# Altium PCB Arduino DDS shield Rev 6.PcbDoc
Units mil, origin at the board's own origin, x right, y up, seen from the top; angles counter-clockwise.
Board outline 6000 x 4000 mil, 2 copper layers (Top Layer, Bottom Layer); 19 components, 15 nets, 96 pads, 2 vias.
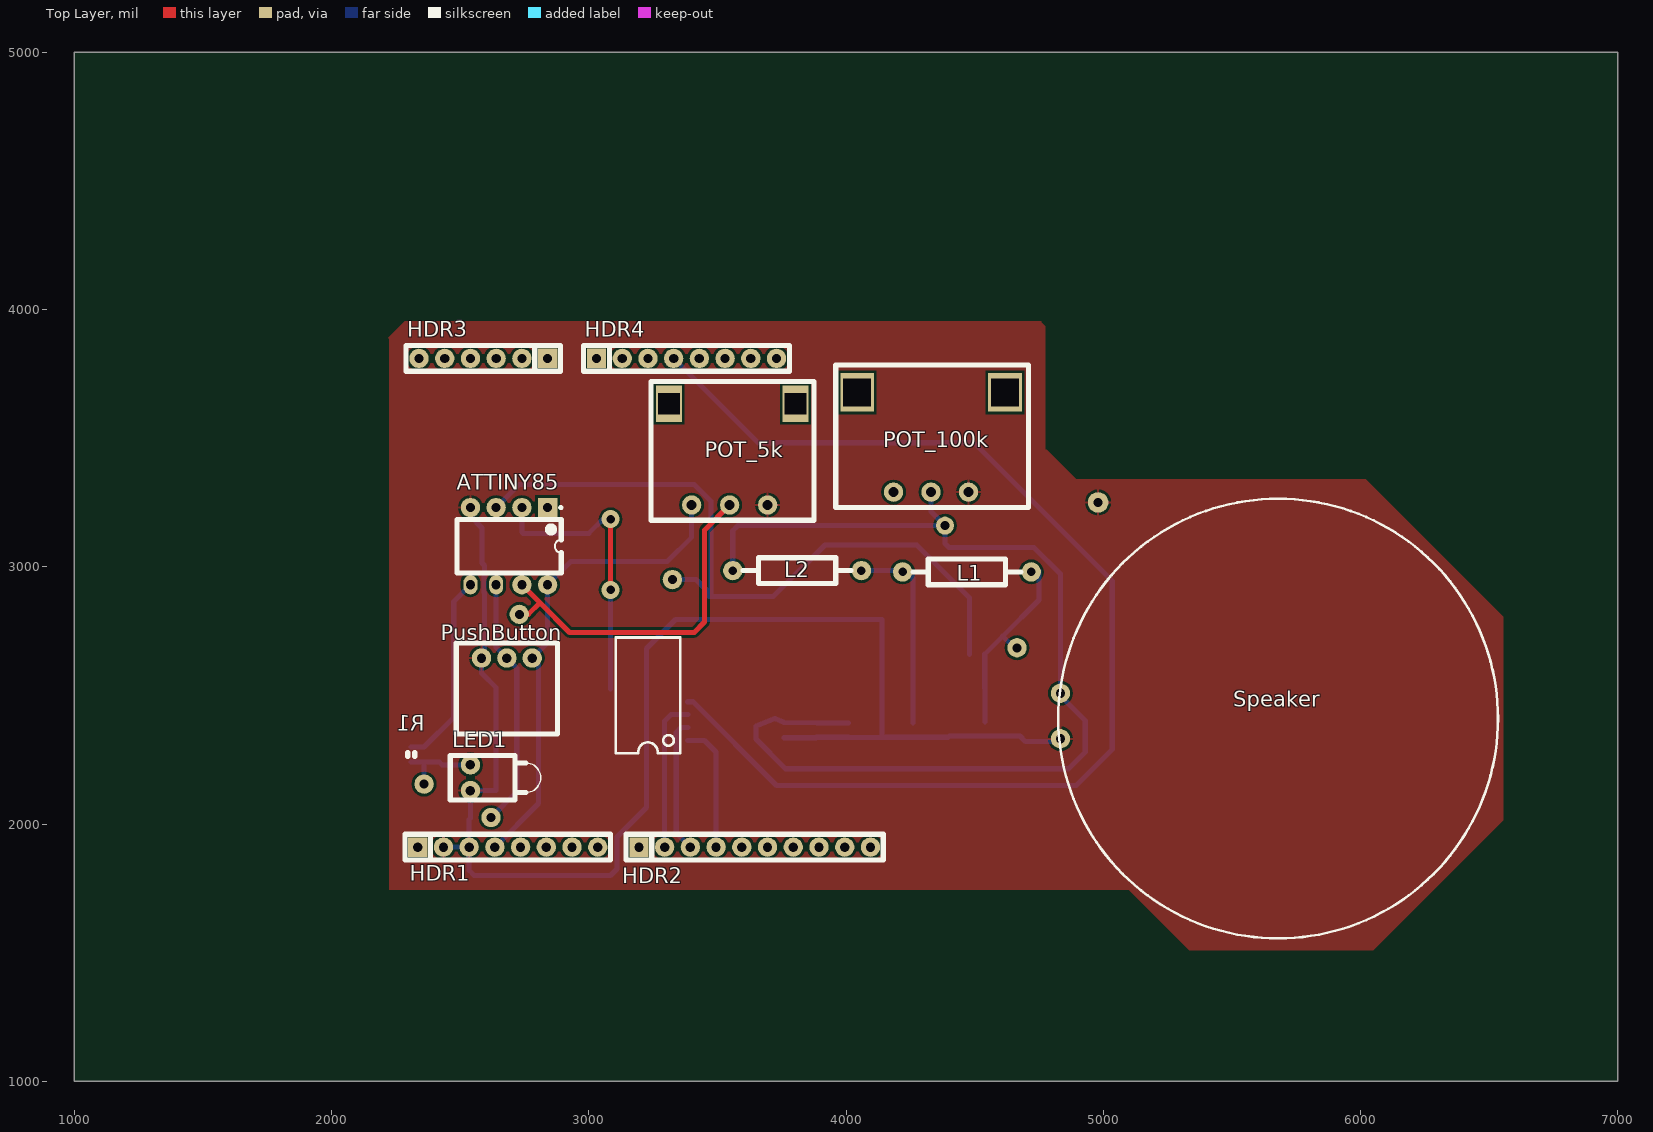
[diagram p0: Top Layer view]
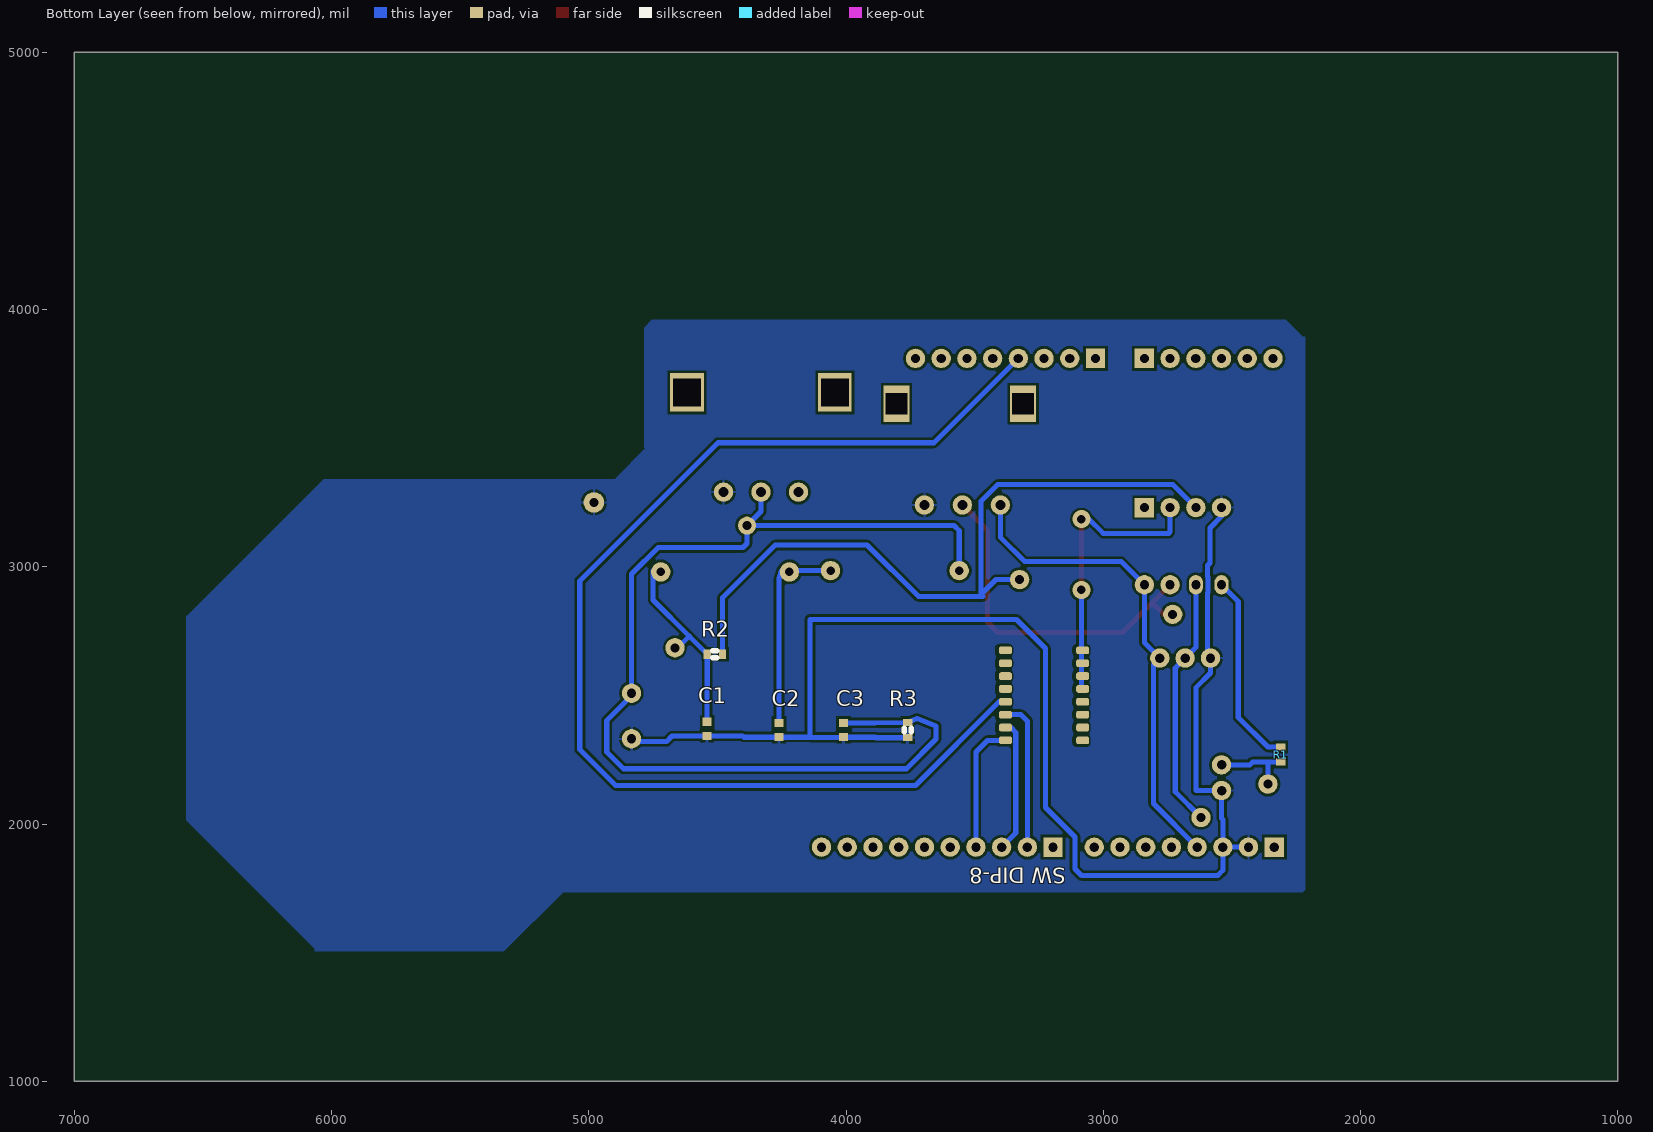
[diagram p1: Bottom Layer view, seen from below]

## Layer stack, top to bottom
Top Solder: solder mask 0.4, Solder Resist, Dk 3.5
Top Layer: signal copper 1.4
Dielectric 1: dielectric 12.6, FR-4, Dk 4.8
Bottom Layer: signal copper 1.4
Bottom Solder: solder mask 0.4, Solder Resist, Dk 3.5

## Board outline
1000,1000 7000,1000 7000,5000 1000,5000

## Design rules (kind name [scope] priority, off if disabled: settings)
Clearance Clearance_1 [All] p1: gap=10
Clearance [All] p2: gap=20
PolygonConnect [All] p1: connectstyle=Relief reliefconductorwidth=10 reliefentries=4 polygonreliefangle="90 Angle" airgapwidth=10
RoutingVias [All] p1: holewidth=28 width=50 viastyle="Through Hole" minholewidth=28 minwidth=50 maxholewidth=28 maxwidth=50
SolderMaskExpansion [All] p1: expansion=4
Width [All] p1: maxlimit=20 minlimit=20 preferedwidth=20 minimp=50.000000 maximp=50.000000 favimp=50.000000
30 further rules are at their usual default settings.

## Components (designator, comment, footprint, x,y, rotation, side; value= is the part's Value field where it differs from the comment)
ATTINY85 "ATtiny85-20PU" 8P3 2690,3080 r270 top
C1 "Cap Semi" 1608[0603] 4540,2370 r90 bottom
C2 "Cap Semi" 1608[0603] 4260,2365 r90 bottom
C3 "Cap Semi" 1608[0603] 4010,2365 r90 bottom
HDR1 "POWER_UNO" "Header 8x1 8.5mm" 2335,1910 r0 top
HDR2 "IOH" "Header 10x1 8.5mm" 3195,1910 r0 top
HDR3 "AD" "Header 6x1 8.5mm" 2840,3810 r180 top
HDR4 "IOL" "Header 8x1 8.5mm" 3030,3810 r0 top
L1 "Inductor" AXIAL-0.5 4470,2980 r180 top
L2 "Inductor" AXIAL-0.5 3810,2985 r180 top
LED1 "LED1" LED-1 2540,2180 r0 top
POT_5k "POT1" Pot5k 3400,3240 r0 top
POT_100k "Component_1" pot100k 4185,3290 r0 top
PushButton "BUTTON1" PushButtonFrame 2780,2645 r180 top
R1 "Res3" J1-0603#1 2310,2270 r90 top
R2 "Res3" J1-0603#2 4510,2660 r180 bottom
R3 "Res3" J1-0603#2 3760,2365 r90 bottom
Speaker "SPKR1" PCBComponent_1 5680,2410 r0 top
"SW DIP-8" "SW DIP-8" DIP8posSolder 3380,2325 r270 bottom

## Footprints (in the part's own frame and the unit in brackets; to place one, negate y for a bottom-side part, rotate by r counter-clockwise, add the part's x,y. Pads: shape width x height; smd on the part's side, far side on the other; paste and mask are expansions set on the pad)
8P3 [mm] "DIP, 8-Leads, Row Spacing 7.62mm, Pitch 2.54mm, Body 9.59x6.61mm"
  rect 1.908x1.908 hole 0.9 unplated paste+1.016: 1(-3.81,3.81)
  round 1.908 hole 0.9 unplated paste+1.016: 2(-3.81,1.27) 3(-3.81,-1.27) 4(-3.81,-3.81) 7(3.81,1.27) 8(3.81,3.81)
  oval 1.908x1.4 hole 0.9 unplated paste+1.016: 5(3.81,-3.81) 6(3.81,-1.27)
  silkscreen extent -3.93,-5.15 2.65,5.24, body extent -3.6,-5.15 3.6,5.15, height 5.34
1608[0603] [mm] "Chip Capacitor, Body 1.6x0.8mm, IPC High Density"
  rect 0.8x0.9 smd paste+0.508 mask+0.254: 1(-0.7,0) 2(0.7,0)
  body extent -0.87,-0.48 0.87,0.48, height 1.3
AXIAL-0.5 [mm] "Axial Device, Thru-Hole; 2 Leads; 0.5 in Pin Spacing"
  round 1.908 hole 0.85 unplated paste+1.016: 1(-6.35,0) 2(6.35,0)
  silkscreen extent -5.33,-1.27 5.33,1.27
DIP8posSolder [mm]
  rrect50% 0.76x1.27 smd paste+0.254: 1(0,0) 2(-1.27,0) 3(-2.54,0) 4(-3.81,0) 5(-5.08,0) 6(-6.35,0) 7(-7.62,0) 8(-8.89,0) 9(0,7.62) 10(-1.27,7.62) 11(-2.54,7.62) 12(-3.81,7.62) 13(-5.08,7.62) 14(-6.35,7.62) 15(-7.62,7.62) 16(-8.89,7.62)
"Header 6x1 8.5mm" [mil] "Stackable 6 pin header"
  rect 75.12x75.12 hole 36 unplated paste+40: 1(0,0)
  round 75.12 hole 36 unplated paste+40: 2(100,0) 3(200,0) 4(300,0) 5(400,0) 6(500,0)
  silkscreen extent -50,-50 550,50, body extent -50,-50 550,50, height 335
"Header 8x1 8.5mm" [mil] "Stackable 8 pin header"
  rect 75.12x75.12 hole 36 unplated paste+40: 1(0,0)
  round 75.12 hole 36 unplated paste+40: 2(100,0) 3(200,0) 4(300,0) 5(400,0) 6(500,0) 7(600,0) 8(700,0)
  silkscreen extent -50,-50 750,50, body extent -50,-50 750,50, height 335
"Header 10x1 8.5mm" [mil] "Stackable 10 pin header"
  rect 75.12x75.12 hole 36 unplated paste+40: 1(0,0)
  round 75.12 hole 36 unplated paste+40: 2(100,0) 3(200,0) 4(300,0) 5(400,0) 6(500,0) 7(600,0) 8(700,0) 9(800,0) 10(900,0)
  silkscreen extent -50,-50 950,50, body extent -50,-50 950,50, height 335
J1-0603#1 [mm] "Chip Resistor, Body 1.6x0.8mm, IPC High Density"
  rect 0.7x0.9 smd far side paste+0.508 mask+0.254: 1(-0.75,0) 2(0.75,0)
  silkscreen extent -0.2,-0.35 0.2,0.35, body extent -0.85,-0.48 0.85,0.48, height 0.9
J1-0603#2 [mm] "Chip Resistor, Body 1.6x0.8mm, IPC High Density"
  rect 0.7x0.9 smd paste+0.508 mask+0.254: 1(-0.75,0) 2(0.75,0)
  silkscreen extent -0.2,-0.35 0.2,0.35, body extent -0.85,-0.48 0.85,0.48, height 0.9
LED-1 [mil] "LED; 2 Leads"
  round 75.12 hole 36.5 unplated paste+40: 1(0,50) 2(0,-50)
  silkscreen extent -79,-87 274,87
PCBComponent_1 [mm]
  round 1.908 hole 0.914 unplated paste+1.016: 0(-21.5,2.5) 1(-21.5,-2)
  silkscreen extent -21.71,-21.71 21.71,21.71
Pot5k [mm]
  round 1.908 hole 1 unplated paste+1.016: 1(0,0) 2(3.75,0) 3(7.5,0)
  rect 2.557x3.559 hole 2.1 square unplated paste+1.016: ThroughHole1(-2.25,10)
  rect 2.543x3.556 hole 2.1 square unplated paste+1.016: ThroughHole2(10.25,10)
  silkscreen extent -4,-1.5 12.06,12.19
pot100k [mm]
  round 1.908 hole 1 unplated paste+1.016: 1(0,0) 2(3.7,0) 3(7.4,0)
  rect 3.31x3.81 hole 2.7 square unplated paste+1.016: ThroughHole1(-3.6,9.85)
  rect 3.322x3.81 hole 2.7 square unplated paste+1.016: ThroughHole2(11,9.85)
  silkscreen extent -5.71,-1.5 13.33,12.57
PushButtonFrame [mm]
  round 1.908 hole 0.927 unplated paste+1.016: 0(0,0) 1(2.5,0) 2(5,0)
  silkscreen extent -2.5,-1.5 7.5,7.5

## Part data
ATTINY85: "Low Power tinyAVR® 8-Bit Microcontroller, 8K Flash Memory, 20MHz, Industrial Temperature, 8-Lead PDIP, Pb-Free"
C1 C2 C3: "Capacitor (Semiconductor SIM Model)"
LED1: "Typical RED GaAs LED"
POT_5k: library part Component_1, "5k RES"
POT_100k: "5k RES"
PushButton: library part PushButton
R1 R2 R3: "Resistor"
Speaker: library part Component_1
"SW DIP-8": "DIP Switch, 8 Position, SPST"

## Free pads (board coordinates)
  round 70 hole 35: 2(4385,3160)
  round 80 hole 35: 4(4980,3250)
  round 75 hole 35: 6(3325,2950) 7(2730,2815) 8(2360,2155) 9(2620,2025) 10(4665,2685)

## Via types
v1: diameter 70, hole 33.53, Top Layer to Bottom Layer, 2 vias

## Nets (pads, with @x,y where several pads share a name; then routed paths per layer and width w, separated by ;. In a path a pad name is that pad's centre, name@x,y a point inside that pad or via, vN(x,y) a via of type N, cw(c..) or ccw(c..) an arc to the next point about the centre after c; other vN are vias at no path point)
ARD_SIG_HEADER_PIN_04: "SW DIP-8.4" HDR4.4 | length 4560.9
  Bottom Layer w20: HDR4.4 3658,3482 4498,3482 5035,2945 5035,2290 4895,2150 3730,2150 3405,2475 3385,2475
ARD_SIG_HEADER_PIN_09: "SW DIP-8.3" HDR2.2 | length 590.4
  Bottom Layer w20: HDR2.2 3295,2400 3320,2425 3385,2425
ARD_SIG_HEADER_PIN_10: "SW DIP-8.2" HDR2.3 | length 521.7
  Bottom Layer w20: 3385,2375 3359,2375 3340,2356 3340,1965 HDR2.3
ARD_SIG_HEADER_PIN_11: "SW DIP-8.1" HDR2.4 | length 498.6
  Bottom Layer w20: 3385,2325 3450,2325 3495,2280 HDR2.4
ARDU_TO_TINY_MAINSIGNAL: "SW DIP-8.13" "SW DIP-8.14" "SW DIP-8.15" "SW DIP-8.16" ATTINY85.2 | length 1124.9
  Top Layer w20: v1(3085,2910) v1(3085,3185)
  Bottom Layer w20: ATTINY85.2 2740,3135 2745,3130 3000,3130 3055,3185 v1(3085,3185) ; 3085,2525 3085,2575 3085,2625 3085,2675 v1(3085,2910)
DDS/CHEB/1: C2.2 L1.2 L2.1 | length 784.1
  Bottom Layer w20: L2.1 4250,2985 4260,2955 C2.2
DDS/CHEB/2: C3.2 L2.2 pad.2 POT_100k.2 R3.2 Speaker.0 | length 4214.3
  Bottom Layer w20: L2.2 3560,3140 3580,3160 pad.2 ; C3.2 3887.94,2392.56 R3.2 3723.96,2410.2 3650,2381.06 3650,2330 3765,2215 4865,2215 4930,2280 4930,2401.97 4833.54,2498.43 4833.54,2971.46 4730,3075 4400,3075 4385,3090 pad.2 ; POT_100k.2 4330.67,3214.33 pad.2
DIGITAL_MODE_SWITCH: ATTINY85.6 pad.9 PushButton.1 | length 979.6
  Bottom Layer w20: pad.9 2720,2125 2720,2606.57 PushButton.1 2640,2686.57 ATTINY85.6
"DSS RC": C1.2 L1.1 pad.10 R2.1 | length 748.9
  Bottom Layer w20: C1.2 4540,2528 4539.53,2528.47 R2.1 4609.53,2730 ; pad.10 4654.53,2685 4609.53,2730 ; L1.1@4750,2985 4750,2870.47 4609.53,2730
"DSS SIGNAL OUT": ATTINY85.3 pad.6 R2.2 | length 2846.1
  Bottom Layer w20: ATTINY85.3 2730,3320 3410,3320 3475,3255 3475,2892 ; pad.6 3417,2950 3475,2892 ; R2.2 4480.47,2879.53 4275,3085 3918,3085 3718,2885 3468,2885 3475,2892
GND: ATTINY85.4 C1.1 C2.1 C3.1 HDR1.2 HDR1.3 LED1.2 pad.4 POT_5k.3 POT_100k.3 PushButton.2 R3.1 Speaker.1 | length 5913.9
  Bottom Layer w20: HDR1.2 HDR1.3 ; ATTINY85.4 2540,3196 2585,3151 2585,3015 2595,3005 2595,2962.26 2592.44,2959.7 2592.44,2900.3 2595,2897.74 2595,2656.85 PushButton.2 2583.15,2586.85 2640,2530 2640,2130 LED1.2 2540,2022 2535,2017 HDR1.3 ; C3.1 3885.97,2337.44 3884.63,2336.1 ; 4140,2342.4 4140,2795 3337,2795 3224,2682 3224,2064 3110,1950 3110,1825 3085,1800 2555,1800 2535,1820 HDR1.3 ; Speaker.1@4833.54,2321.26 4697.18,2321.26 4676,2342.44 C1.1 4402,2342.44 4397,2337.44 C2.1 4152.47,2337.44 4140.03,2337.38 4010,2336.73 3884.63,2336.1 ; 3884.63,2336.1 3884,2335.47 R3.1 3884.63,2336.1
LED_TO_RESISTOR: LED1.1 pad.8 R1.1 | length 321.9
  Bottom Layer w20: R1.1 2365,2240.47 ; pad.8 2360,2235.47 2365,2240.47 ; LED1.1 2429.47,2230 2419,2240.47 2365,2240.47
MANUAL_FREQUENCY_SIGNAL: ATTINY85.7 pad.7 POT_5k.2 | length 1397.3
  Top Layer w20: pad.7 2765,2815 2810,2860 ; ATTINY85.7 2810,2860 ; POT_5k.2 3450,3142.36 3450,2785 3410,2745 2925,2745 2810,2860
TINY_TO_LED_SIGNAL_OUT: ATTINY85.5 R1.2 | length 755
  Bottom Layer w20: R1.2 2360,2299.53 2475,2414.53 2475,2865 ATTINY85.5
VCC: ATTINY85.8 HDR1.4 POT_5k.1 PushButton.0 | length 1887.3
  Bottom Layer w20: HDR1.4 2805,2080 2805,2620 PushButton.0 2840,2705 ATTINY85.8 2930,3020 3305,3020 3400,3115 POT_5k.1
pads on no net: "SW DIP-8.5" "SW DIP-8.6" "SW DIP-8.7" "SW DIP-8.8" "SW DIP-8.9" "SW DIP-8.10" "SW DIP-8.11" "SW DIP-8.12" ATTINY85.1 HDR1.1 HDR1.5 HDR1.6 HDR1.7 HDR1.8 HDR2.1 HDR2.5 HDR2.6 HDR2.7 HDR2.8 HDR2.9 HDR2.10 HDR3.1 HDR3.2 HDR3.3 HDR3.4 HDR3.5 HDR3.6 HDR4.1 HDR4.2 HDR4.3 HDR4.5 HDR4.6 HDR4.7 HDR4.8 POT_5k.ThroughHole1 POT_5k.ThroughHole2 POT_100k.1 POT_100k.ThroughHole1 POT_100k.ThroughHole2

## Polygon pours and split planes (outlines as drawn)
GND on Top Layer "Mechanical 1-No Net" (solid, pour order 6): 2290,3955 2285,3955 2220,3890 2225,3885 2225,1745 5100,1745 5335,1510 6050,1510 6555,2015 6555,2020 6555,2805 6020,3340 4895,3340 4780,3455 4775,3455 4775,3935 4760,3950 4760,3955 2295,3955
GND on Bottom Layer "Mechanical 1-No Net" (solid, pour order 8): 2285,3955 2225,3895 2215,3895 2215,1745 2225,1735 5100,1735 5330,1505 6065,1505 6065,1515 6560,2010 6565,2015 6565,2810 6560,2810 6030,3340 4895,3340 4895,3345 4780,3460 4785,3465 4785,3925 4785,3930 4760,3955 4755,3960 2290,3960

## Silkscreen, mask and mechanical layers (free items; w line width, h text height)
Mechanical 1:
  lines w20: 2220.18,1745 2295,1745 5100,1745 5335,1510 6050,1510 6555,2015 6555,2805 6020,3340 4890,3340 4775,3455 4775,3940 4760,3955 2285,3955 2220.18,3890.18 2220.18,1745